# EAGLE board avr_programmer (EAGLE 4.16)
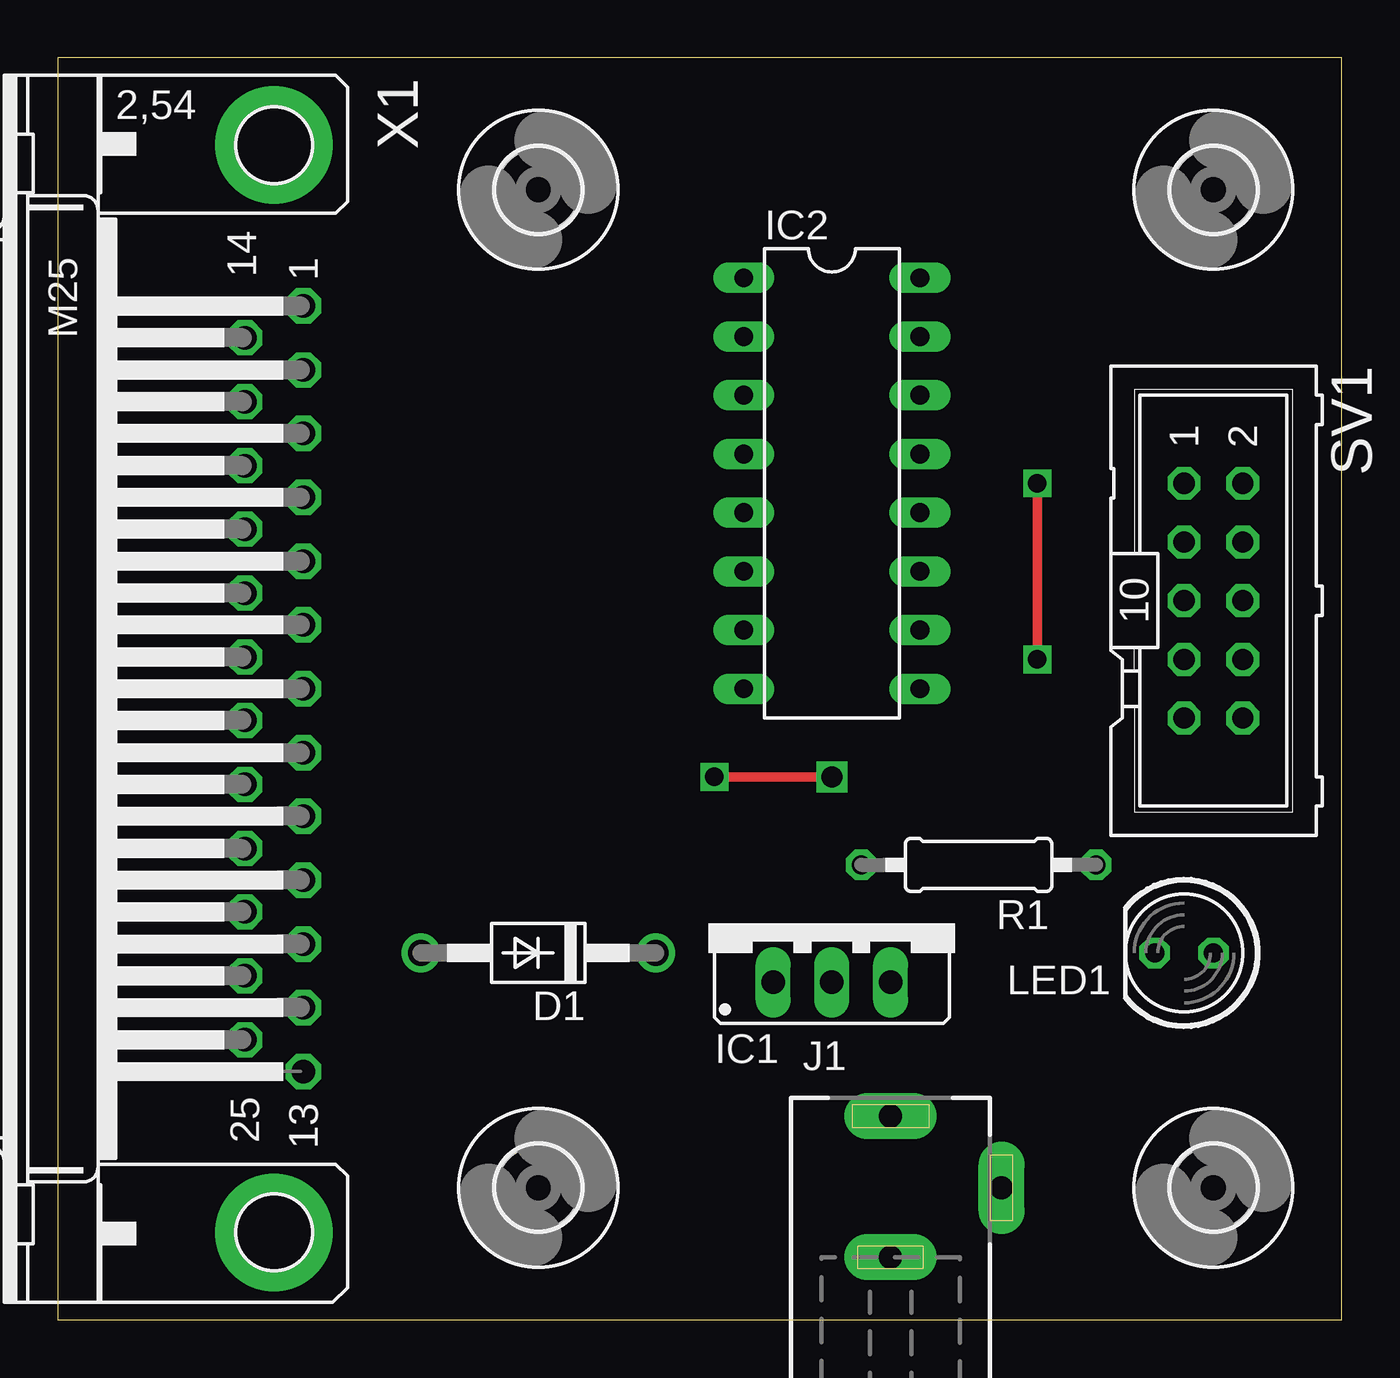
[diagram p0: board, top side]
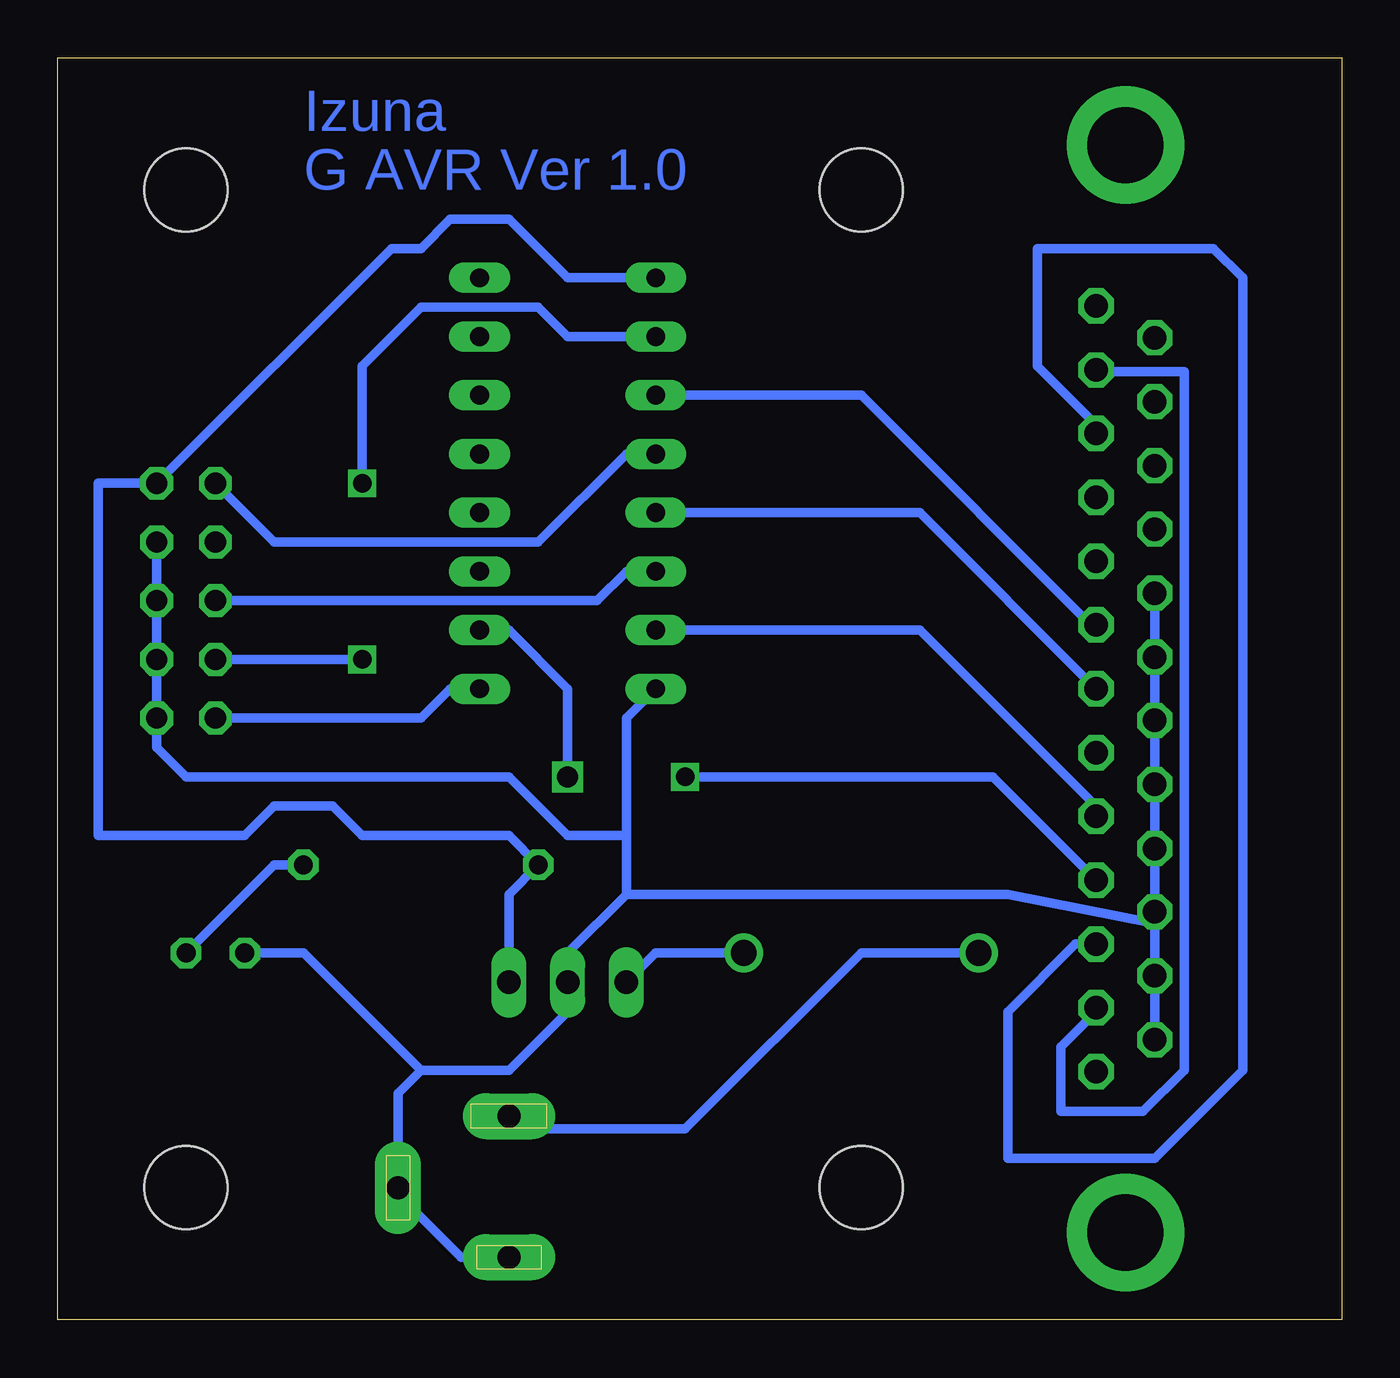
[diagram p1: board, bottom side, seen from below]

Size 55.55 x 54.6 mm. Coordinates in mm from the lower left corner, seen from the top.
Outline: 0,0 55.55,0 55.55,54.6 0,54.6 0,0
Copper layers (1*16): Top 0.035mm / dielectric 1.5mm / Bottom 0.035mm
Design rules "default": minimum track width 10mil, minimum drill 24mil, track to track 8mil, track to pad 8mil, pad to pad 8mil, via to via 8mil, smd to smd 8mil, copper to edge 40mil, drill to drill 8mil, minimum pad ring 10mil, minimum via ring 8mil, stop-mask expansion 4mil, vias tented up to drill 0mil, thermal gap 10mil

## Footprints (pad centres in the part's own frame; a part is rotated, then mirrored left to right if it is on the bottom)
DO41-10 = drill 1.118 round: A 5.08,0; C -5.08,0
78XXS = drill 1.016 long: GND 0,-2.54; IN -2.54,-2.54; OUT 2.54,-2.54
DIL16 = drill 0.813 long: 1 -8.89,-3.81; 2 -6.35,-3.81; 3 -3.81,-3.81; 4 -1.27,-3.81; 5 1.27,-3.81; 6 3.81,-3.81; 7 6.35,-3.81; 8 8.89,-3.81; 9 8.89,3.81; 10 6.35,3.81; 11 3.81,3.81; 12 1.27,3.81; 13 -1.27,3.81; 14 -3.81,3.81; 15 -6.35,3.81; 16 -8.89,3.81
DCJ0202 = drill 1 pad 2 long: 1 0,3.1; 2 4.8,0; 3 0,-3
LED5MM = drill 0.813 octagon: A -1.27,0; K 1.27,0
0207/10 = drill 0.813 octagon: 1 -5.08,0; 2 5.08,0
ML10 = drill 0.914 octagon: 1 -5.08,-1.27; 2 -5.08,1.27; 3 -2.54,-1.27; 4 -2.54,1.27; 5 0,-1.27; 6 0,1.27; 7 2.54,-1.27; 8 2.54,1.27; 9 5.08,-1.27; 10 5.08,1.27
3,6 = hole 3.6: 0,0
M25HP = drill 1.016 octagon: 1 -16.561,1.27; 2 -13.792,1.27; 3 -11.049,1.27; 4 -8.28,1.27; 5 -5.512,1.27; 6 -2.769,1.27; 7 0,1.27; 8 2.769,1.27; 9 5.512,1.27; 10 8.28,1.27; 11 11.049,1.27; 12 13.792,1.27; 13 16.561,1.27; 14 -15.189,-1.27; 15 -12.421,-1.27; 16 -9.652,-1.27; 17 -6.909,-1.27; 18 -4.14,-1.27; 19 -1.372,-1.27; 20 1.372,-1.27; 21 4.14,-1.27; 22 6.909,-1.27; 23 9.652,-1.27; 24 12.421,-1.27; 25 15.189,-1.27 | drill 3.302 pad 5.08 round: G1 -23.52,0; G2 23.52,0

## Placement (x,y rotation side)
D1  1N4001  [DO41-10]  20.79,15.87 180 top
IC1  7805  [78XXS]  33.49,17.14 0 top
IC2  4050N  [DIL16]  33.49,36.19 270 top
J1  [DCJ0202]  36.03,5.71 0 top
LED1  [LED5MM]  48.73,15.87 180 top
R1  330  [0207/10]  39.84,19.68 180 top
SV1  [ML10]  50,31.11 270 top
U$1  [3,6]  20.79,48.89 0 top
U$2  [3,6]  20.79,5.71 0 top
U$3  [3,6]  50,5.71 0 top
U$4  [3,6]  50,48.89 0 top
X1  [M25HP]  9.36,27.3 270 top

## Library data of the parts
D1 = diode
IC1 J1 LED1 R1 X1 = Basic
IC2 = 40xx
SV1 = con-harting-ml
U$1-U$4 = holes

## Nets
+5V: IC1.OUT IC2.1 R1.2 SV1.2
+12V: D1.C IC1.IN
GND: IC1.GND IC2.8 J1.2 J1.3 LED1.K SV1.4 SV1.6 SV1.8 SV1.10 X1.18 X1.19 X1.20 X1.21 X1.22 X1.23 X1.24 X1.25
N$1: LED1.A R1.1
N$2: IC2.3 X1.6
N$3: IC2.2 SV1.7
N$4: IC2.5 X1.7
N$5: IC2.4 SV1.1
N$6: IC2.7 X1.9
N$7: IC2.6 SV1.5
N$8: IC2.10 X1.10
N$9: IC2.9 SV1.9
N$10: SV1.3
N$11: D1.A J1.1
N$12: X1.2 X1.12
N$13: X1.3 X1.11

## Tracks (layer width: path | path; a pad name or v marks a point on that pad's centre or on a via)
+5V
  Bottom 0.406: IC1.OUT 36.03,18.41 R1.2 36.03,20.95 42.38,20.95 43.65,22.22 46.19,22.22 47.46,20.95 53.81,20.95 53.81,36.19 SV1.2 41.11,46.35 39.84,46.35 38.57,47.62 36.03,47.62 33.49,45.08 IC2.1
+12V
  Bottom 0.406: D1.C 29.68,15.87 IC1.IN
GND
  Bottom 0.406: SV1.8 SV1.10 51.27,24.76 50,23.49 36.03,23.49 33.49,20.95 30.95,20.95 | SV1.8 SV1.6 | SV1.6 SV1.4 SV1.6 | SV1.8 SV1.6 | 30.95,18.41 33.49,15.87 IC1.GND 33.49,13.33 36.03,10.79 39.84,10.79 | 35.57,2.71 J1.3 38.11,2.71 41.11,5.71 J1.2 40.83,9.8 39.84,10.79 | LED1.K 44.92,15.87 39.84,10.79 | X1.19 8.09,28.57 | X1.19 X1.18 | X1.19 X1.20 X1.21 X1.22 X1.23 8.09,17.14 | 8.09,17.14 X1.24 X1.25 | IC2.8 30.95,26.03 30.95,20.95 | 30.95,18.41 30.95,20.95 | 8.09,17.14 14.44,18.41 30.95,18.41
N$1
  Bottom 0.406: R1.1 46.19,19.68 LED1.A
N$2
  Bottom 0.254: 10.38,30.35 X1.6
  Bottom 0.406: X1.6 10.63,29.84 20.79,40 IC2.3
N$3  (via drill 0.8)
  Top 0.406: v42.38,28.57 v42.38,36.19
  Bottom 0.406: v42.38,28.57 SV1.7 | IC2.2 33.49,42.54 34.76,43.81 39.84,43.81 42.38,41.27 v42.38,36.19
N$4
  Bottom 0.406: IC2.5 18.25,34.92 X1.7
N$5
  Bottom 0.406: SV1.1 46.19,33.65 34.76,33.65 30.95,37.46 IC2.4
N$6
  Bottom 0.406: X1.9 10.63,22.22 18.25,29.84 IC2.7
N$7
  Bottom 0.406: SV1.5 32.22,31.11 30.95,32.38 IC2.6
N$8  (via drill 0.8, 0.9)
  Top 0.406: v28.41,23.49 v33.49,23.49
  Bottom 0.406: v33.49,23.49 33.49,27.3 36.03,29.84 IC2.10 | X1.10 15.1,23.49 v28.41,23.49
N$9
  Bottom 0.406: SV1.9 39.84,26.03 38.57,27.3 IC2.9
N$11
  Bottom 0.406: D1.A 20.79,15.87 28.41,8.25 36.03,8.25 J1.1
N$12
  Bottom 0.254: 10.38,41.02 X1.2
  Bottom 0.406: 10.38,41.02 6.82,41.02 6.82,10.79 8.6,9.01 12.15,9.01 12.15,11.81 10.63,13.33 X1.12
N$13
  Bottom 0.406: X1.3 10.25,38.35 13.17,41.27 13.17,46.35 5.55,46.35 4.28,45.08 4.28,10.79 8.09,6.98 14.44,6.98 14.44,13.33 11.52,16.25 X1.11

## Text on the board
Bottom: Izuna | G AVR Ver 1.0